# Altium PCB PCB1.PcbDoc
Units mil, origin at the board's own origin, x right, y up, seen from the top; angles counter-clockwise.
Board outline 6000 x 4000 mil, 2 copper layers (Top Layer, Bottom Layer); 42 components, 43 nets, 232 pads, 2 vias.
Unrouted connection lines stored in the file: 95.
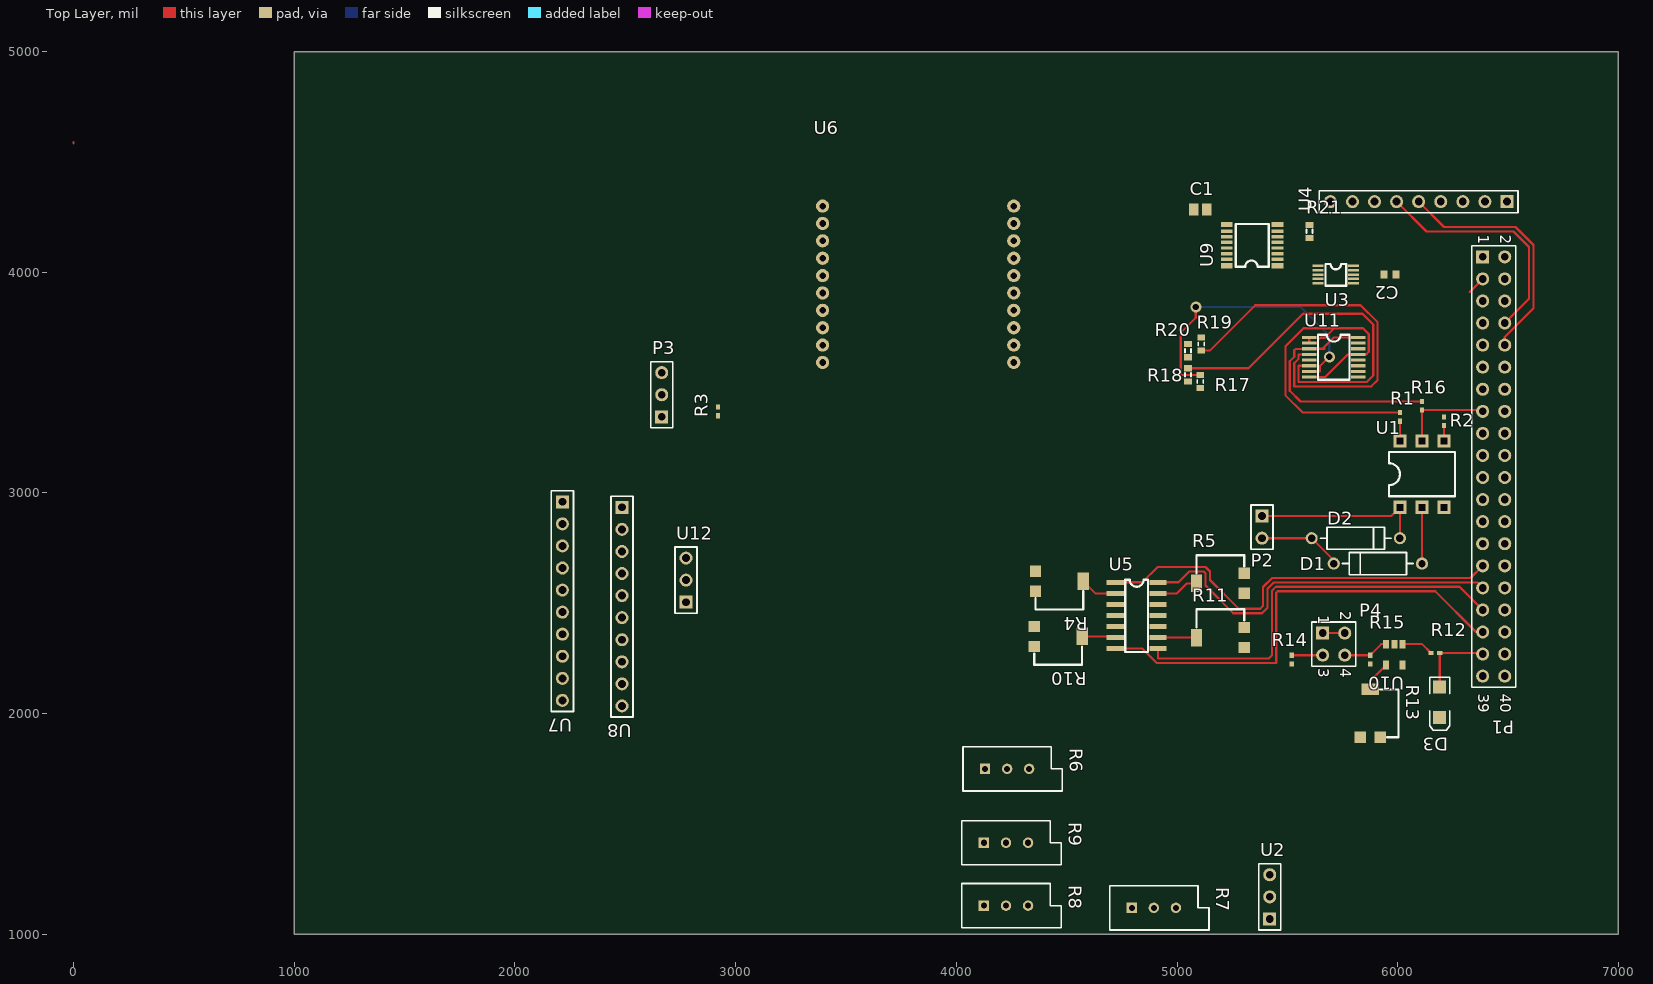
[diagram p0: Top Layer view]
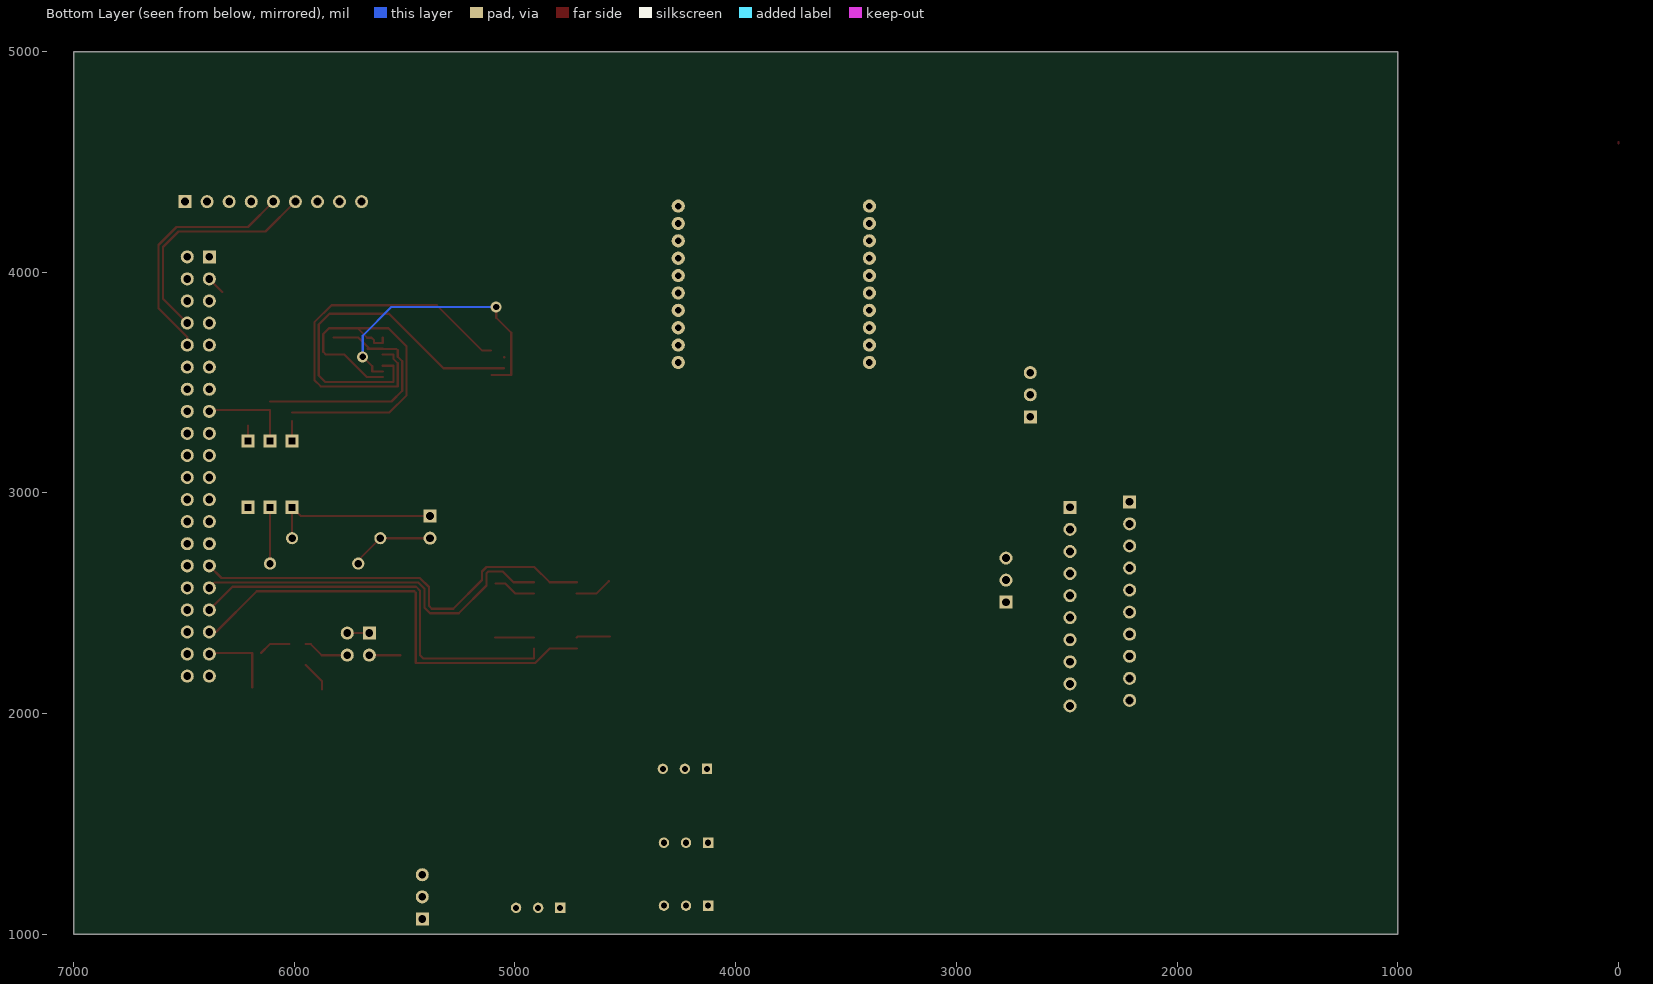
[diagram p1: Bottom Layer view, seen from below]

## Layer stack, top to bottom
Top Solder: solder mask 0.4, Solder Resist, Dk 3.5
Top Layer: signal copper 1.4
Dielectric 1: dielectric 12.6, FR-4, Dk 4.8
Bottom Layer: signal copper 1.4
Bottom Solder: solder mask 0.4, Solder Resist, Dk 3.5

## Board outline
1000,1000 7000,1000 7000,5000 1000,5000

## Design rules (kind name [scope] priority, off if disabled: settings)
Clearance [All] p1: gap=10 ignorepadtopadclearanceinfootprint=FALSE except(0: Arc-Hole Track-Hole SMDPad-Hole THPad-Hole Via-Hole Fill-Hole Poly-Hole Region-Hole Text-Hole)
PolygonConnect [All] p1: connectstyle=Relief reliefconductorwidth=10 reliefentries=4 polygonreliefangle="90 Angle" airgapwidth=10
RoomDefinition Sheet1 [InComponentClass('Sheet1')] p1: confinementstyle=ConfineIn formatcopy=TRUE lockcomponents=FALSE outline 0,0 2000,0 2000,1000 0,1000
RoutingVias [All] p1: holewidth=28 width=50 viastyle="Through Hole" minholewidth=28 minwidth=50 maxholewidth=28 maxwidth=50
SolderMaskExpansion [All] p1: expansion=4
Width [All] p1: maxlimit=10 minlimit=10 preferedwidth=10
30 further rules are at their usual default settings.

## Components (designator, comment, footprint, x,y, rotation, side; value= is the part's Value field where it differs from the comment)
C1 "Cap Pol3" C0805 5105.47,4285 r0 top value=10uF
C2 "Cap Semi" 1608[0603] 5965,3990 r180 top value=100pF
D1 "Diode" DIODE-0.4 5910,2680 r180 top
D2 "Diode" DIODE-0.4 5810,2795 r0 top
D3 "LED2" 3.2X1.6X1.1 6190,2051.1 r270 top
P1 "Header 20X2" HDR2X20 6385,4070 r270 top
P2 "Header 2" HDR1X2 5385,2895 r270 top
P3 "Header 3" HDR1X3 2665,3345 r90 top
P4 "Header 2X2" HDR2X2 5660,2365 r270 top
R1 "Res1" 0402 6010,3345 r270 top value=1M
R2 "Res1" 0402 6210,3325 r270 top value=10K
R3 "Res1" 0402 2920,3369.68 r90 top value=2K
R4 "RPot SM" 23BR10KLFTR 4358.46,2554.72 r180 top
R5 "RPot SM" 23BR10KLFTR 5305,2635.55 r0 top
R6 "RPot" VR5 4230,1750 r0 top value=10K
R7 "RPot" VR5 4895,1120 r0 top value=10K
R8 "RPot" VR5 4225,1130 r0 top value=10K
R9 "RPot" VR5 4225,1415 r0 top value=10K
R10 "RPot SM" 23BR10KLFTR 4353.46,2304.72 r180 top
R11 "RPot SM" 23BR10KLFTR 5305,2390 r0 top
R12 "Res3" 0402 6170.31,2275 r0 top value=330
R13 "RPot SM" 23BR10KLFTR 5920.28,1893.46 r270 top
R14 "Res3" 0402 5520,2244.68 r270 top value=100
R15 "Res3" 0402 5875,2245 r90 top value=10K
R16 "Res3" 0402 6110,3395 r90 top value=10K
R17 "Res3" J1-0603 5050,3535.47 r270 top value=1K
R18 "Res3" J1-0603 5105,3505.47 r270 top value=1K
R19 "Res3" J1-0603 5110,3674.53 r270 top value=1K
R20 "Res3" J1-0603 5050,3644.53 r270 top value=1K
R21 "Res3" J1-0603 5600,4185.47 r90 top value=1K
U1 "4N35" 4N35 6010,2935 r90 top
U2 "LM35CZ/NOPB" HDR1X3 5420,1070 r90 top
U3 "ADS1015IDGST" ADS1015IDGST 5719.5,3989.69 r0 top
U4 "746" HDR1X9 6495,4320 r180 top
U5 "TLV2464CDR" TLV2464CDR 4817,2445 r0 top value=Value
U6 "XBP24CZ7WIT-004" XBP24CZ7WIT-004 3393.86,4299.92 r0 top
U7 "1714" HDR1X10 2215,2960 r270 top
U8 "1714" HDR1X10 2485,2935 r270 top
U9 "SC16IS741AIPWJ" SC16IS741AIPWJ 5455,4029.29 r90 top
U10 "TLV2461IDBVR" TLV2461IDBVR 6022.4,2315 r180 top
U11 "TCA9546APWR" TCA9546APWR 5710,3615 r0 top
U12 "LM35CZ/NOPB" HDR1X3 2775,2505 r90 top

## Footprints (in the part's own frame and the unit in brackets; to place one, negate y for a bottom-side part, rotate by r counter-clockwise, add the part's x,y. Pads: shape width x height; smd on the part's side, far side on the other; paste and mask are expansions set on the pad)
3.2X1.6X1.1 [mm] "SMT LED; 2 Flat Leads"
  rect 1.5x1.5 smd: 1(-1.75,0) 2(1.75,0)
  silkscreen extent -2.9,-1.15 3.2,1.15
4N35 [mil] "OPTOISO 3.55KV TRANS W/BASE 6DIP"
  rect 60x60 hole 30 square: 1(0,0) 2(0,-100) 3(0,-200) 4(300,-200) 5(300,-100) 6(300,0)
  silkscreen extent 50,-250 250,50, body extent -9,-280 309,90, height 230
23BR10KLFTR [mm] "TRIMMER 10K OHM 0.25W SMD"
  rect 1.3x1.3 smd: 1(0,0) 3(0,-2.3)
  rect 1.3x2 smd: 2(-5.5,-1.15)
  silkscreen extent -5.5,0 0,2.1, body extent -6.1,-3.7 0.5,1.38, height 3.05
0402 [mm] "Chip Capacitor, Body 1.0x0.5mm, IPC High Density"
  rect 0.6x0.5 smd: 1(-0.5,0) 2(0.5,0)
  body extent -0.55,-0.3 0.55,0.3, height 1.3
1608[0603] [mm] "Chip Capacitor, Body 1.6x0.8mm, IPC High Density"
  rect 0.8x0.9 smd: 1(-0.7,0) 2(0.7,0)
  body extent -0.87,-0.48 0.87,0.48, height 1.3
ADS1015IDGST [mil]
  rect 50x11 smd paste+0 mask+0: 1(-80.5,39.37) 2(-80.5,19.68) 3(-80.5,0) 4(-80.5,-19.69) 5(-80.5,-39.37) 6(80.5,-39.37) 7(80.5,-19.69) 8(80.5,0) 9(80.5,19.68) 10(80.5,39.37)
  silkscreen extent -47,-51 47,47, body extent -94,-59 98,59, height 45
C0805 [mm] "Chip Capacitor, Body 2.0x1.3mm, IPC High Density"
  rect 1.1x1.4 smd: 1(-0.75,0) 2(0.75,0)
  body extent -1.1,-0.72 1.1,0.72, height 1.4
DIODE-0.4 [mm] "Diode, Thru-Hole; 2 Leads; 0.4 in Pin Spacing"
  round 1.4 hole 0.85: 1(-5.08,0) 2(5.08,0)
  silkscreen extent -4.06,-1.27 4.06,1.27
HDR1X2 [mm] "Connector; Header; 2 Position"
  rect 1.5x1.5 hole 0.9: 1(0,0)
  round 1.5 hole 0.9: 2(2.54,0)
  silkscreen extent -1.27,-1.27 3.81,1.27
HDR1X3 [mm] "Connector; Header; 3 Position"
  rect 1.5x1.5 hole 0.9: 1(0,0)
  round 1.5 hole 0.9: 2(2.54,0) 3(5.08,0)
  silkscreen extent -1.27,-1.27 6.35,1.27
HDR1X9 [mm] "Connector; Header; 9 Position"
  rect 1.5x1.5 hole 0.9: 1(0,0)
  round 1.5 hole 0.9: 2(2.54,0) 3(5.08,0) 4(7.62,0) 5(10.16,0) 6(12.7,0) 7(15.24,0) 8(17.78,0) 9(20.32,0)
  silkscreen extent -1.27,-1.27 21.59,1.27
HDR1X10 [mm] "Connector; Header; 10 Position"
  rect 1.5x1.5 hole 0.9: 1(0,0)
  round 1.5 hole 0.9: 2(2.54,0) 3(5.08,0) 4(7.62,0) 5(10.16,0) 6(12.7,0) 7(15.24,0) 8(17.78,0) 9(20.32,0) 10(22.86,0)
  silkscreen extent -1.27,-1.27 24.13,1.27
HDR2X2 [mm] "Connector; Header; 2x2 Position"
  rect 1.5x1.5 hole 0.9: 1(0,0)
  round 1.5 hole 0.9: 2(0,2.54) 3(2.54,0) 4(2.54,2.54)
  silkscreen extent -1.27,-1.27 3.81,3.81
HDR2X20 [mm] "Connector; Header; 20x2 Position"
  rect 1.5x1.5 hole 0.9: 1(0,0)
  round 1.5 hole 0.9: 2(0,2.54) 3(2.54,0) 4(2.54,2.54) 5(5.08,0) 6(5.08,2.54) 7(7.62,0) 8(7.62,2.54) 9(10.16,0) 10(10.16,2.54) 11(12.7,0) 12(12.7,2.54) 13(15.24,0) 14(15.24,2.54) 15(17.78,0) 16(17.78,2.54) 17(20.32,0) 18(20.32,2.54) 19(22.86,0) 20(22.86,2.54) 21(25.4,0) 22(25.4,2.54) 23(27.94,0) 24(27.94,2.54) 25(30.48,0) 26(30.48,2.54) 27(33.02,0) 28(33.02,2.54) 29(35.56,0) 30(35.56,2.54) 31(38.1,0) 32(38.1,2.54) 33(40.64,0) 34(40.64,2.54) 35(43.18,0) 36(43.18,2.54) 37(45.72,0) 38(45.72,2.54) 39(48.26,0) 40(48.26,2.54)
  silkscreen extent -1.27,-1.27 49.53,3.81
J1-0603 [mm] "Chip Resistor, Body 1.6x0.8mm, IPC High Density"
  rect 0.7x0.9 smd: 1(-0.75,0) 2(0.75,0)
  silkscreen extent -0.2,-0.35 0.2,0.35, body extent -0.85,-0.48 0.85,0.48, height 0.9
SC16IS741AIPWJ [mm] "IC UART SGL I2C BUS SPI 16TSSOP"
  rect 0.6x1.35 smd: 1(0,0) 8(4.75,0) 9(4.75,5.85) 16(0,5.85)
  rect 0.4x1.35 smd: 2(0.75,0) 3(1.4,0) 4(2.05,0) 5(2.7,0) 6(3.35,0) 7(4,0) 10(4,5.85) 11(3.35,5.85) 12(2.7,5.85) 13(2.05,5.85) 14(1.4,5.85) 15(0.75,5.85)
  silkscreen extent -0.1,1 4.8,4.8, body extent -0.2,-0.33 4.8,6.13, height 1.08
TCA9546APWR [mil]
  rect 66x14 smd paste+0 mask+0: 1(-111,89.57) 2(-111,63.98) 3(-111,38.39) 4(-111,12.8) 5(-111,-12.8) 6(-111,-38.39) 7(-111,-63.98) 8(-111,-89.57) 9(111,-89.57) 10(111,-63.98) 11(111,-38.39) 12(111,-12.8) 13(111,12.8) 14(111,38.39) 15(111,63.98) 16(111,89.57)
  silkscreen extent -71,-102 71,102, body extent -127,-94 127,102, height 37
TLV2461IDBVR [mm] "IC OPAMP GP 6.4MHZ RRO SOT23-5"
  rect 0.7x1 smd: 1(0,0) 2(0.95,0) 3(1.9,0) 4(1.9,2.4) 5(0,2.4)
TLV2464CDR [mil]
  rect 78x22 smd paste+0 mask+0: 1(-97,150) 2(-97,100) 3(-97,50) 4(-97,0) 5(-97,-50) 6(-97,-100) 7(-97,-150) 8(97,-150) 9(97,-100) 10(97,-50) 11(97,0) 12(97,50) 13(97,100) 14(97,150)
  silkscreen extent -51,-165 51,161, body extent -121,-173 121,173, height 79
VR5 [mm] "Thru-Hole; 3 Leads"
  rect 1.2x1.2 hole 0.7: 1(-2.54,0)
  round 1.2 hole 0.7: 2(0,0) 3(2.54,0)
  silkscreen extent -5.08,-2.54 6.35,2.54
XBP24CZ7WIT-004 [mil] "RF TXRX MODULE 802.15.4 WIRE ANT"
  round 60 hole 30: 1(0,0) 2(0,-78.74) 3(0,-157.48) 4(0,-236.22) 5(0,-314.96) 6(0,-393.7) 7(0,-472.44) 8(0,-551.18) 9(0,-629.92) 10(0,-708.66) 11(866.14,-708.66) 12(866.14,-629.92) 13(866.14,-551.18) 14(866.14,-472.44) 15(866.14,-393.7) 16(866.14,-314.96) 17(866.14,-236.22) 18(866.14,-157.48) 19(866.14,-78.74) 20(866.14,0)
  body extent -50,-1000 910,297, height 231

## Part data
C1: "Polarized Capacitor (Surface Mount)", LatestRevisionDate=29-May-2009, LatestRevisionNote="IPC-7351 Footprint Added.", PackageDescription="Chip Capacitor", PackageReference=C0805, Published=8-Jun-2000, Publisher="Altium Limited"
C2: "Capacitor (Semiconductor SIM Model)", LatestRevisionDate=29-May-2009, LatestRevisionNote="IPC-7351 Footprint Added.", PackageDescription="Chip Capacitor", PackageReference=C1206, Published=8-Jun-2000, Publisher="Altium Limited"
D1 D2: "Default Diode", Code_JEDEC=DO-214-AB, LatestRevisionDate=17-Jul-2002, LatestRevisionNote="Re-released for DXP Platform.", PackageDescription="DO-214-AB/SMC; 2 C-Bend Leads; Body 7.9 x 5.9 mm, inc. leads (LxW)", PackageReference=SMC, PackageVersion=Sep-1996, Published=8-Jun-2000, Publisher="Altium Limited"
D3: "Typical RED, GREEN, YELLOW, AMBER GaAs LED", LatestRevisionDate=17-Jul-2002, LatestRevisionNote="Re-released for DXP Platform.", PackageDescription="SM LED; 2 Flat Leads", PackageReference=3.2X1.6X1.1, PackageVersion=Feb-2002, Published=8-Jun-2000, Publisher="Altium Limited"
P1: "Header, 20-Pin, Dual row", LatestRevisionDate=17-Jul-2002, LatestRevisionNote="Re-released for DXP Platform.", Publisher="Altium Limited"
P2: "Header, 2-Pin", LatestRevisionDate=17-Jul-2002, LatestRevisionNote="Re-released for DXP Platform.", Publisher="Altium Limited"
P3: "Header, 3-Pin", LatestRevisionDate=17-Jul-2002, LatestRevisionNote="Re-released for DXP Platform.", Publisher="Altium Limited"
P4: "Header, 2-Pin, Dual row", LatestRevisionDate=17-Jul-2002, LatestRevisionNote="Re-released for DXP Platform.", Publisher="Altium Limited"
R1 R2 R3 R12 R14 R15 R16 R17 R18 R19 R20 R21: "Resistor", Published=8-Jun-2000, Publisher="Altium Limited"
  R1 R2 R3: LatestRevisionDate=17-Jul-2002, LatestRevisionNote="Re-released for DXP Platform.", PackageDescription="Axial Device, Thru-Hole; 2 Leads; 0.3 in Pin Spacing", PackageReference=AXIAL-0.3
  R12 R14 R15 R16 R17 R18 R19 R20 R21: LatestRevisionDate=29-May-2009, LatestRevisionNote="IPC-7351 Footprint Added.", PackageDescription="Chip Resistor", PackageReference=J1-0603
R4 R5 R10 R11 R13: "Square Trimming Potentiometer", ComponentLink1Description="Manufacturer Link", ComponentLink1URL=http://bourns.com/2/search.html, DatasheetVersion=Oct-2003, PackageDescription="Square Trimming Potentiometer", PackageReference=POT4MM-2, Published=17-Dec-2003, Publisher="Altium Limited"
R6 R7 R8 R9: "Potentiometer", LatestRevisionDate=17-Jul-2002, LatestRevisionNote="Re-released for DXP Platform.", PackageDescription="Variable Resistor, Thru-Hole; 3 Leads", PackageReference=VR5, Published=8-Jun-2000, Publisher="Altium Limited", Set Position=0.5, Sim Note="Enter the Resistance value and the set point into parameter fields."
U1: "OPTOISO 3.55KV TRANS W/BASE 6DIP", Mfr 1="Lite-On Inc.", Mfr 1 PN=4N35
U2 U12: "SENSOR TEMP ANLG VOLT TO-92-3", Mfr 1="Texas Instruments", Mfr 1 PN=LM35CZ/NOPB
U3: "IC ADC 12BIT I2C W/REF 10-MSOP", Mfr 1="Texas Instruments", Mfr 1 PN=ADS1015IDGST
U4: "GPS BREAKOUT 66CH W/10HZ UPDATES", Mfr 1=Adafruit, Mfr 1 PN=746
U5: "IC OPAMP GP 6.4MHZ RRO 14SOIC", Built_By=EMA_UL_Team, C="Copyright (C) 2015 Accelerated Designs. All rights reserved", Manufacturer_Part_Number=TLV2464CDR, RefDes=RefDes, Type=Type, Vendor="Texas Instruments"
U6: "RF TXRX MODULE 802.15.4 WIRE ANT", Mfr 1="Digi International", Mfr 1 PN=XBP24CZ7WIT-004
U7 U8: "9-DOF IMU BREAKOUT BRD", Mfr 1=Adafruit, Mfr 1 PN=1714
U9: "IC UART SGL I2C BUS SPI 16TSSOP", Mfr 1="NXP USA Inc.", Mfr 1 PN=SC16IS741AIPWJ
U10: "IC OPAMP GP 6.4MHZ RRO SOT23-5", Mfr 1="Texas Instruments", Mfr 1 PN=TLV2461IDBVR
U11: "IC I2C SW 4CH W/RESET 16TSSOP", Mfr 1="Texas Instruments", Mfr 1 PN=TCA9546APWR

## Via types
v1: diameter 50, hole 28, Top Layer to Bottom Layer, 2 vias

## Nets (pads, with @x,y where several pads share a name; then routed paths per layer and width w, separated by ;. In a path a pad name is that pad's centre, name@x,y a point inside that pad or via, vN(x,y) a via of type N, cw(c..) or ccw(c..) an arc to the next point about the centre after c; other vN are vias at no path point)
GND: C1.2 C2.1 D3.2 P1.6 P1.9 P1.14 P1.25 P1.30 P1.34 P1.39 P3.2 R1.1 R2.1 R4.1 R6.1 R8.2 R9.2 R10.3 R11.3 R13.3 R14.2 R15.1 U2.1 U3.1 U3.3 U4.7 U5.11 U6.10 U7.3 U8.3 U9.9 U10.2 U11.1 U11.2 U11.8 U11.13 U12.1 | length 1766.5
  Top Layer w10: U11.8 5671.46,3525.43 5773.82,3627.8 U11.13 5856.8,3627.8 5869,3640 5869,3720 5843,3746 5712.02,3746 ; U11.1 U11.2 5638.27,3678.98 5638.27,3691.8 5650,3703.53 5669.55,3703.53 5712.02,3746 ; R1.1 5569.31,3364.69 5491,3443 5491,3664 5573,3746 5712.02,3746
NetD1_1: D1.1 U1.2 | length 255
  Top Layer w10: D1.1 U1.2
NetD1_2: D1.2 D2.1 P2.2 | length 381.4
  Top Layer w10: P2.2 D2.1 5710,2695 D1.2
NetD2_2: D2.2 P2.1 U1.1 | length 781.6
  Top Layer w10: P2.1 5970,2895 U1.1 D2.2
NetD3_1: D3.1 P1.37 R12.2 | length 352.1
  Top Layer w10: D3.1 R12.2 6380,2275 P1.37
NetP1_3: P1.3 U3.9 U9.6 U11.15 | length 84.7
  Top Layer w10: 6325.13,3910.13 P1.3
NetP1_5: P1.5 U3.10 U9.5 U11.14 | length 15
  Top Layer w10: P1.5@6374.37,3880.63 P1.5
NetP1_7: P1.7 R21.1 U9.7
NetP1_8: P1.8 U4.6 | length 1075.5
  Top Layer w10: U4.6 6130,4185 6525,4185 6595,4115 6595,3880 P1.8
NetP1_10: P1.10 U4.5 | length 1108.6
  Top Layer w10: U4.5 6210,4205 6533.28,4205 6615,4123.28 6615,3837.03 6485,3707.03 P1.10
NetP1_11: P1.11 P3.3 R3.2
NetP1_15: P1.15 R16.1 U1.5 | length 417.5
  Top Layer w10: U1.5 R16.1 6379.68,3375.32 P1.15
NetP1_29: P1.29 U5.1 | length 1925.6
  Top Layer w10: U5.1 4842.79,2595 4912.43,2664.65 5128.55,2664.65 5149.06,2644.14 5149.06,2605.94 5280,2475 5376.72,2475 5390,2488.28 5390,2573.74 5431.22,2614.96 6329.96,2614.96 P1.29
NetP1_31: P1.31 U5.14 | length 1720.7
  Top Layer w10: U5.14 5007.02,2595 5056.66,2644.65 5120.27,2644.65 5129.06,2635.86 5129.06,2580.94 5255,2455 5385,2455 5410,2480 5410,2565.45 5439.51,2594.96 6360.04,2594.96 P1.31
NetP1_33: P1.33 U5.8 | length 1864
  Top Layer w10: U5.8 4914,2252.07 4916.07,2250 5415,2250 5430,2265 5430,2557.17 5447.79,2574.96 6280.04,2574.96 P1.33
NetP1_35: P1.35 U5.7 | length 2089.9
  Top Layer w10: U5.7 4842.79,2295 4907.79,2230 5450,2230 5450,2548.88 5456.08,2554.96 6170.04,2554.96 6355,2370 P1.35
NetP4_3: P4.3 R14.1 | length 140.3
  Top Layer w10: R14.1 5659.37,2264.37 P4.3
NetP4_4: P4.4 R15.2 U10.3 | length 208.8
  Top Layer w10: P4.4 R15.2@5875.31,2265 ; R15.2 R15.2@5875.31,2265 ; U10.3 5925.31,2315 R15.2@5875.31,2265
NetR1_2: R1.2 U1.6 | length 90.3
  Top Layer w10: U1.6 R1.2
NetR2_2: R2.2 U1.4 | length 70.3
  Top Layer w10: U1.4 R2.2
NetR4_2: R4.2 U5.2 | length 167.8
  Top Layer w10: R4.2 4630,2545 U5.2
NetR5_1: R5.1 R7.1
NetR5_2: R5.2 U5.13 | length 193.2
  Top Layer w10: U5.13 5000,2545 5045.28,2590.28 R5.2
NetR6_3: R6.3 U5.3
NetR7_3: R7.3 U5.12
NetR8_3: R8.3 U5.5
NetR9_3: R9.3 U5.10
NetR10_2: R10.2 U5.6 | length 152.1
  Top Layer w10: R10.2 4715,2350 U5.6
NetR11_2: R11.2 U5.9 | length 177.6
  Top Layer w10: U5.9 5090,2345 R11.2
NetR12_1: R12.1 U10.1 | length 144.8
  Top Layer w10: U10.1 6110.63,2315 R12.1
NetR13_2: R13.2 U10.4 | length 140.6
  Top Layer w10: R13.2 5875,2147.91 U10.4
NetR17_1: R17.1 U7.5 U11.6 | length 1664.2
  Top Layer w10: R17.1 5324,3565 5571,3812 5840,3812 5889,3763 5889,3532 5860,3503 5551,3503 5551,3576.61 U11.6
NetR18_1: R18.1 U7.4 U11.7 | length 1310.8
  Top Layer w10: v1(5085,3843) 5085,3794 5017,3726 5017,3535 R18.1 ; U11.7 5647,3551.02 5647,3574 v1(5690,3617)
  Bottom Layer w10: v1(5085,3843) 5560,3843 5690,3713 v1(5690,3617)
NetR19_2: R19.2 U8.5 U11.4 | length 1767.7
  Top Layer w10: R19.2 5148,3645 5354,3851 5831,3851 5909,3773 5909,3512 5880,3483 5531,3483 5531,3588 5551,3608 5551,3626 5552.8,3627.8 U11.4
NetR20_2: R20.2 U8.4 U11.5 | length 2.7
  Top Layer w10: R20.2@5047.29,3615 R20.2
NetU2_2: U2.2 U3.4
NetU3_5: U3.5 U12.2
NetU6_2: U6.2 U9.13
NetU6_3: U6.3 U9.12
NetU6_12: U6.12 U9.10
NetU6_16: U6.16 U9.11
VCC3.3: C1.1 C2.2 P1.1 P1.17 P4.1 P4.2 R13.1 R16.2 R17.2 R18.2 R19.1 R20.1 R21.2 U2.3 U3.8 U4.8 U6.1 U6.5 U7.1 U8.1 U9.1 U9.2 U9.3 U9.8 U9.14 U10.5 U11.3 U11.16 U12.3 | length 1300.5
  Top Layer w10: U11.3 5658.66,3653.39 ; P4.1 P4.2 ; U11.16 5709.84,3704.57 5663.33,3658.06 ; R16.2 5559.31,3414.69 5511,3463 5511,3596.61 5531,3616.61 5531,3646.6 5537.4,3653 5658.27,3653 5658.66,3653.39 ; 5658.66,3653.39 5668,3653.39 5663.33,3658.06 ; 5658.66,3653.39 5663.33,3658.06
VCC5: P1.2 P1.4 P3.1 R3.1 R4.3 R5.3 R6.2 R7.2 R8.1 R9.1 R10.1 R11.1 U5.4
pads on no net: P1.12 P1.13 P1.16 P1.18 P1.19 P1.20 P1.21 P1.22 P1.23 P1.24 P1.26 P1.27 P1.28 P1.32 P1.36 P1.38 P1.40 U1.3 U3.2 U3.6 U3.7 U4.1 U4.2 U4.3 U4.4 U4.9 U6.4 U6.6 U6.7 U6.8 U6.9 U6.11 U6.13 U6.14 U6.15 U6.17 U6.18 U6.19 U6.20 U7.2 U7.6 U7.7 U7.8 U7.9 U7.10 U8.2 U8.6 U8.7 U8.8 U8.9 U8.10 U9.4 U9.15 U9.16 U11.9 U11.10 U11.11 U11.12
copper on no net: | length 5
  Top Layer w10: 0,4585 0,4590

## Text inside footprints (layer, text, board x,y; h text height)
P1: Top Overlay "1" at 6365,4170 h50 r270; Top Overlay "2" at 6465,4170 h50 r270; Top Overlay "40" at 6465,2090 h50 r270; Top Overlay "39" at 6365,2090 h50 r270
P4: Top Overlay "1" at 5640,2445 h50 r270; Top Overlay "2" at 5740,2465 h50 r270; Top Overlay "4" at 5740,2205 h50 r270; Top Overlay "3" at 5640,2205 h50 r270